# Altium PCB 3 motors 1 board.PcbDocFinal.PcbDoc (part 2 of 2)
Units mil, origin at the board's own origin, x right, y up, seen from the top; angles counter-clockwise.
Board outline 4145 x 3550 mil, 4 copper layers (Top Layer, GND, PWR, Bottom Layer), stack 37.817 mil thick; 71 components, 55 nets, 301 pads, 107 vias.
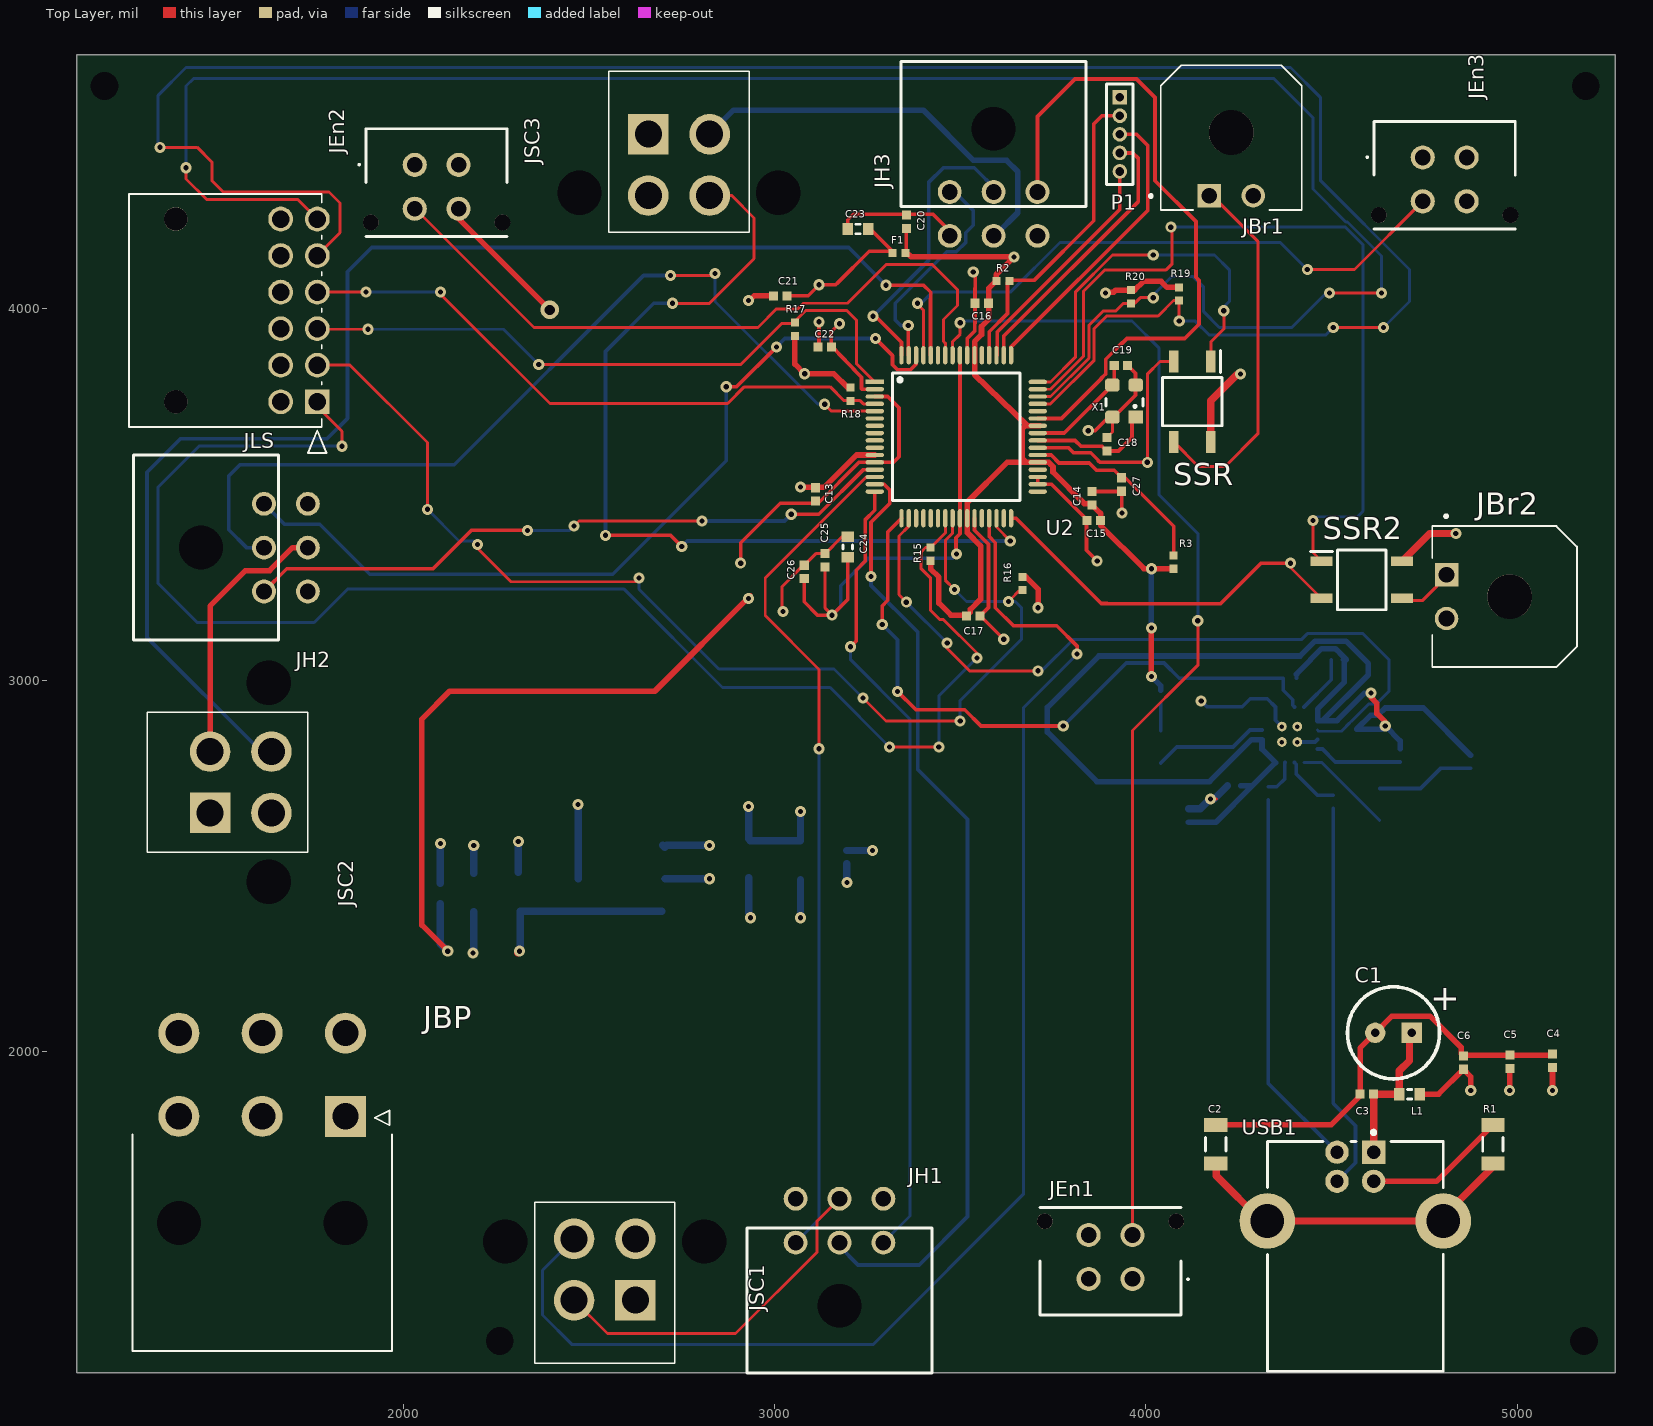
[diagram p0: Top Layer view]

## Via types
v1: diameter 30, hole 14, Top Layer to Bottom Layer, 106 vias
v2: diameter 50, hole 28, Top Layer to Bottom Layer, 1 vias

## Nets (pads, with @x,y where several pads share a name; then routed paths per layer and width w, separated by ;. In a path a pad name is that pad's centre, name@x,y a point inside that pad or via, vN(x,y) a via of type N, cw(c..) or ccw(c..) an arc to the next point about the centre after c; other vN are vias at no path point) (continued)
NO4: (continued)
  Top Layer w8: JLS.4@1768.43,4029.7 1779.5,4029.7 1787.7,4037.9 1787.7,4042.61 1790.09,4045 v1(1900,4045) ; v1(2100,4045) 2100,4040.28 2395.28,3745 2873.78,3745 2918.78,3790 3150,3790 3187.39,3752.61 3230.66,3752.61 3239.17,3744.09 U2.4
  Bottom Layer w8: v1(1900,4045) v1(2100,4045)
NO5: JLS.5 R19.1 U2.45 | length 6001.3
  Top Layer w8: v1(1345,4435) 1445,4435 1485,4395 1485,4345 1515,4315 1800,4315 1830,4285 1830,4205 JLS.5 ; U2.45 3743.49,3744.09 3860.8,3861.4 3860.8,3946.81 3894.79,3980.8 4033.24,3980.8 4074.72,4022.28 R19.1 v1(4090,3966.86) ; v1(4505,3950) v1(4640,3950)
  Bottom Layer w8: v1@1340,4435 1340,4575 1415,4650 4389.83,4650 4470,4569.83 4470,4346.1 4710,4106.1 4710,4020 v1(4640,3950) ; v1(4090,3966.86) 4133.14,3966.86 4170,3930 4485,3930 v1(4505,3950)
NO6: JLS.6 R20.1 U2.46 | length 5517.5
  Top Layer w8: v1(1415,4380) 1415,4350 1470,4295 1715.28,4295 JLS.6 ; U2.46 3743.38,3763.78 3846.8,3867.2 3846.8,3955.82 3885.78,3994.8 3919.8,3994.8 3940,4015 R20.1 R20.1@3970,4015 ; R20.1@3970,4015.03 3970.36,4015.03 3985.33,4030 v1(4020,4030) ; v1(4495,4042.61) v1@4627.61,4042.61
  Bottom Layer w8: v1(1415,4380) 1415,4600 1435,4620 4345,4620 4450,4515 4450,4322.59 4538.59,4234 4543.52,4234 4635,4142.52 v1(4635,4042.61) ; v1(4020,4030) 4020,4037.61 4069.81,4087.43 4126.65,4087.43 4155.79,4058.28 4155.79,3992.28 4198.07,3950 4393.15,3950 4480,4036.85 v1@4485,4036.85
OSC0: C18.2 U2.40 X1.1 | length 336
  Top Layer w10: U2.40 3809.33,3645.67 3825.09,3629.91 3881.98,3629.91 C18.2 3926.48,3616.89 3962.99,3653.4 X1.1@3962.99,3708.39
OSC1: C19.2 U2.41 X1.3 | length 309.2
  Top Layer w10: U2.41 3780.35,3665.35 X1.3 3915,3800 C19.2
PWM1: JSC1.4 U2.29 | length 3784.1
  Top Layer w10: U2.29 3578.07,3386.89 3594.78,3370.18 3594.78,3195.22 3643.28,3146.72 3760,3146.72 3815,3091.72 v1(3815,3070)
  Bottom Layer w8: JSC1.4 2375,1410.35 2375,1290 2455,1210 3265,1210 3670,1615 3670,2925 v1(3815,3070)
PWM2: JSC2.4 U2.60 | length 3720.6
  Top Layer w10: v1(3300,4063.56) 3401.44,4063.56 3420.59,4044.41 3420.59,4028.05 3420,4027.46 3420,3875.59 U2.60
  Bottom Layer w10: JSC2.4 1617.32,2807.68 1310,3115 1310,3560 1400,3650 1795,3650 1850,3705 1850,4100 1915,4165 3200,4165 3232.88,4132.12 3232.88,4130.68 v1(3300,4063.56)
PWM3: JSC3.4 U2.30 | length 2433.1
  Top Layer w8: v1(2725.04,4015) 2825,4015 2945,4135 2945,4245 2885,4305 JSC3.4 ; U2.30 3597.76,3412.24 v1(3635,3375)
  Top Layer w10: v1(2545,3390) 2720,3390 v1(2750,3360)
  Bottom Layer w10: v1(2545,3390) 2545,3885 2675,4015 v1@2720,4015 ; v1(2750,3360) 2765,3375 v1(3635,3375)
RESET: C27.2 R3.2 U2.38 | length 524.5
  Top Layer w10: U2.38 3745.05,3606.3 3766.34,3585 3847.43,3585 3867.43,3565 3915,3565 C27.2 3944.4,3545 4075,3414.4 R3.2
SHIELD: C2.2 R1.2 USB1.5 USB1.6 | length 896.9
  Top Layer w20: C2.2@4190,1700 4190,1665 4311.69,1543.31 USB1.6 4789.02,1543.31 R1.2@4939.27,1693.56
SSRIn: SSR.1 U2.48 | length 1034.1
  Top Layer w8: U2.48 3743.15,3803.15 3811,3871 3811,4046 3910,4145 v1(4020,4145) ; SSR.1 4175,3911 4210,3946 v1(4210,3995)
  Bottom Layer w8: v1(4020,4145) 4185,4145 4225,4105 4225,4020 v1@4210,4005
SSRIn2: SSR2.1 U2.47 | length 2206.1
  Top Layer w8: U2.47 3743.26,3783.46 3832.8,3873 3832.8,4047.8 3890,4105 4055,4105 4070,4120 v1@4070,4220 ; v1(4450,3430) 4450,3343.46 SSR2.1
  Bottom Layer w8: v1(4067.39,4220) 4537.72,4220 4585,4172.72 4585,3455 4570,3440 4462.59,3440
SSROut: JBr1.1 SSR.3 | length 994
  Top Layer w8: SSR.3 4141.73,3575 4213.11,3575 4301.57,3663.46 4301.57,4181.86 JBr1.1@4170.94,4312.49
SSROut2: JBr2.1 SSR2.3 | length 125.3
  Top Layer w8: SSR2.3@4718.27,3215 4745.87,3215 JBr2.1@4814.92,3284.06
TCK: P1.2 R2.2 U2.52 | length 852.2
  Top Layer w10: U2.52@3578.07,3879.65 3578.07,3938.07 3627.72,3987.72 3627.72,4070 R2.2 3634.36,4076.64 3699.2,4076.64 3860,4237.44 3860,4498.02 3881.98,4520 P1.2
TDI: P1.4 U2.50 | length 736.4
  Top Layer w10: U2.50 3617.44,3926.9 3980,4289.46 3980,4405 3965,4420 P1.4
TDO: P1.3 U2.49 | length 804.8
  Top Layer w10: U2.49 3637.13,3897.13 4005,4265 4005,4440 3975,4470 P1.3
TMS: P1.5 U2.51 | length 645.8
  Top Layer w10: U2.51@3600,3875 3600,3937.37 3930,4267.37 P1.5 P1.5@3940,4360
"USB RX LED": D2.2 U3.5 | length 268.5
  Bottom Layer w8: U3.5 4473.83,2777.87 D2.2
"USB TX LED": D1.2 U3.11 | length 309.8
  Bottom Layer w10: D1.2 4083.31,2820 4235,2820 4280.46,2865.46 U3.11
USB_RX: R4.1 U2.17 U3.15 | length 1760.1
  Top Layer w10: v1(3290,3150) 3290,3200 3304.92,3214.92 3304.92,3399.09 U2.17 ; v1(3331.45,2969.38) 3380.83,2920 3512.43,2920 3555.98,2876.44 v1(3777.65,2876.44)
  Bottom Layer w10: v1(3290,3150) 3331.45,3108.55 v1(3331.45,2969.38) ; v1(3777.65,2876.44) 3947.39,3046.18 4048.82,3046.18 4090,3005 R4.1 4370.39,2972.47 4395.9,2946.96 4395.9,2932.16 U3.15
USB_TX: R5.1 U2.18 U3.2 | length 2024.7
  Top Layer w8: v1(3355,3210) 3335,3230 3335,3387.98 3361.54,3414.51 U2.18 ; v1(3465,3100) 3465,3085 3525,3025 v1(3710,3025)
  Bottom Layer w8: v1(3355,3210) v1(3465,3100) ; v1(3710,3025) 3720,3025 3805,3110 4420,3110 4435,3125 4585,3125 4655,3055 4655,2970 4620.49,2935.49 4600.12,2935.49 4553.11,2888.48 4552.75,2888.48 4546.89,2882.62 4546.89,2882.26 R5.1 4526.92,2862.28 4465.77,2862.28 U3.2
VBUS: C1.1 C3.2 L1.1 USB1.1 | length 399.5
  Top Layer w20: USB1.1 C3.2@4613.4,1880 ; C3.2 L1.1 4682.73,1947.44 4710.29,1975 4710.29,2043.9 C1.1
VCORE: C24.2 C25.2 C26.2 U2.25 U2.56 | length 1438.3
  Top Layer w8: C25.2 3136.37,3193.63 v1(3155,3175)
  Top Layer w10: C26.2 3080,3210.84 3115.84,3175 v1(3155,3175) 3197.44,3217.44 C24.2 ; v1@3489.02,3340 3489.02,3383.66 3499.33,3393.98 U2.25 U2.56
  Bottom Layer w10: v1(3155,3175) 3178.47,3198.47 3178.47,3254.37 3252.03,3327.93 3477.93,3327.93 v1(3490,3340)
pads on no net: JBP.7 JBP.8 JBr1. JBr2. JEn1.1 JEn1.5 JEn1.6 JEn2.1 JEn2.5 JEn2.6 JEn3.1 JEn3.5 JEn3.6 JH1.6 JH1.7 JH2.6 JH2.7 JH3.6 JH3.7 JLS.13 JLS.14 JSC1.5 JSC1.6 JSC2.5 JSC2.6 JSC3.5 JSC3.6 U2.6 U2.7 U2.8 U2.9 U2.10 U2.19 U2.20 U2.21 U2.22 U2.28 U2.31 U2.33 U2.36 U2.44 U2.53 U2.59 U3.12 U3.14

## Polygon pours and split planes (outlines as drawn)
no net on Bottom Layer "Bottom Layer-No Net" (solid, pour order 38): 4085,2655
+A3.3V on PWR "PWR-+A3.3V" (solid, pour order 75): 2966.91,4288.07 2966.91,3938.07 3436.91,3938.07 3436.91,4288.07
+24V on PWR "PWR-+24V 7" (solid, pour order 77): 1970,2200 2130,2040 2328.85,2040 2910,1458.85 2910,1165 2466.02,1165 2196.02,1435 1265,1435 1265,1855 1255,1870 1255,4570 1255,4665 1970,4665
+24V on PWR "PWR-+24V 6" (solid, pour order 79): 2690,4095 2899.75,4304.75 2899.75,4665 1265,4665 1554.08,4095
+24V on PWR "PWR-+24V" (solid, pour order 133): 4210,4360.38 4210,4050 4465,4050 4500,4085 4465,4120 4465,4360.38
+5V on PWR "PWR-+5V 3" (solid, pour order 105): 3005,2469.01 3005,1320 5140,1320 5140,2469.01
+3.3V on PWR "PWR-+3.3V 2" (solid, pour order 115): 3450,4185.7 3450,3909.15 4140.98,3909.15 4155,3923.17 4149.07,3929.1 4149.07,4185.7
+24V on PWR "PWR-+24V 2" (solid, pour order 93): 4960,3135 4210,3135 4210,4145 4960,4145
+3.3V on PWR "PWR-+3.3V" (solid, pour order 97): 3814.51,3219.5 3814.51,3025 4040,3025 4040,3219.5
+3.3V on PWR "+3.3V_L03_P058" (solid, pour order 58): 3141.74,3909.15 3224.36,3909.15 3270.96,3909.15 3317.56,3909.15 4040,3909.15 4040,3155 2840,3155 2840,3909.15
+5V on PWR "PWR-+5V 1" (solid, pour order 101): 2165,4035 2745.47,4035 2745.47,2620 2165,2620
+5V on PWR "PWR-+5V 2" (solid, pour order 107): 5140,4502.57 4480,4502.57 4485,4497.57 4485,4175.46 4990,4175.46 4990,2145 5140,2145
+3.3V on PWR "PWR-+3.3V 1" (solid, pour order 95): 3814.51,3080 4965.38,3080 4965.38,2485 3825,2485 3820,2490 3814.51,2490
+3.3V on PWR "PWR-+3.3V 3" (solid, pour order 121): 2075,2536.49 2075,2200 2404.4,2200 2405,2200.6 2405,2540 2071.49,2540
+5V on PWR "PWR-+5V" (solid, pour order 127): 2521.03,2769.68 3420,2769.68 3420,2145 2674.91,2145 2524.99,2294.92
+24V on PWR "PWR-+24V 4" (solid, pour order 89): 4470,4665 4470,4315 4405,4315 2850,4315 2850,4665
no net on Top Layer "Top Layer-No Net" (solid, pour order 131): 4730,2655
GND on GND (split plane): 5244.9,1155.1 1140.1,1155.1 1140.1,4664.9 5244.9,4664.9

## Other copper
PWR:
  pour cut-out: 2093,2590.32

## Text inside footprints (layer, text, board x,y; h text height)
C1: Top Overlay "+" at 4765.65,2111.54 h70